# Altium PCB XS128.PcbDoc
Units mil, origin at the board's own origin, x right, y up, seen from the top; angles counter-clockwise.
Board outline 5839 x 5130 mil, 2 copper layers (Top Layer, Bottom Layer); 43 components, 110 nets, 387 pads, 0 vias.
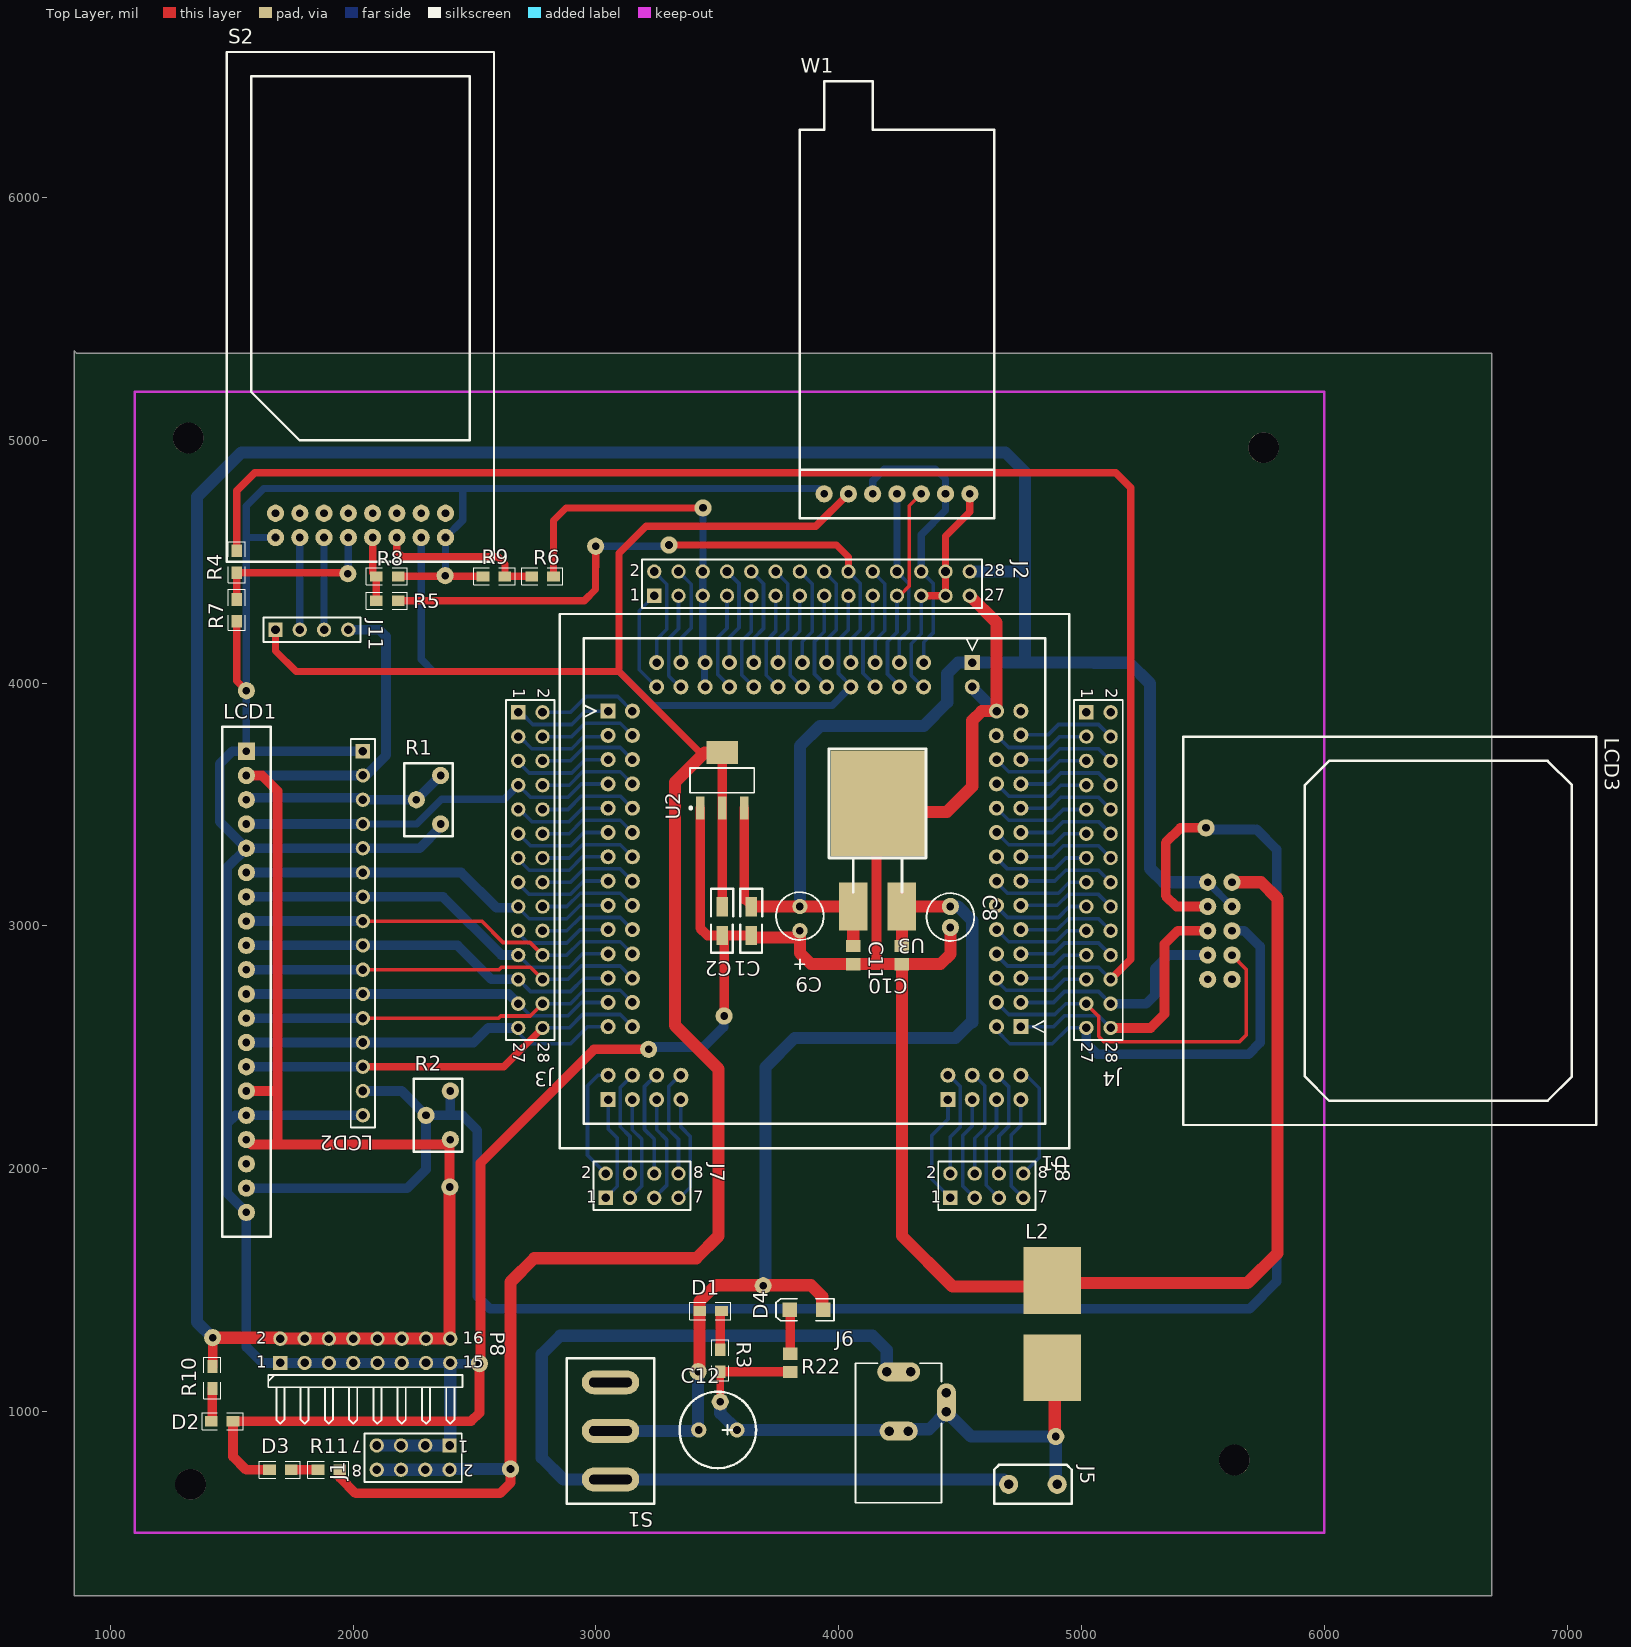
[diagram p0: Top Layer view]
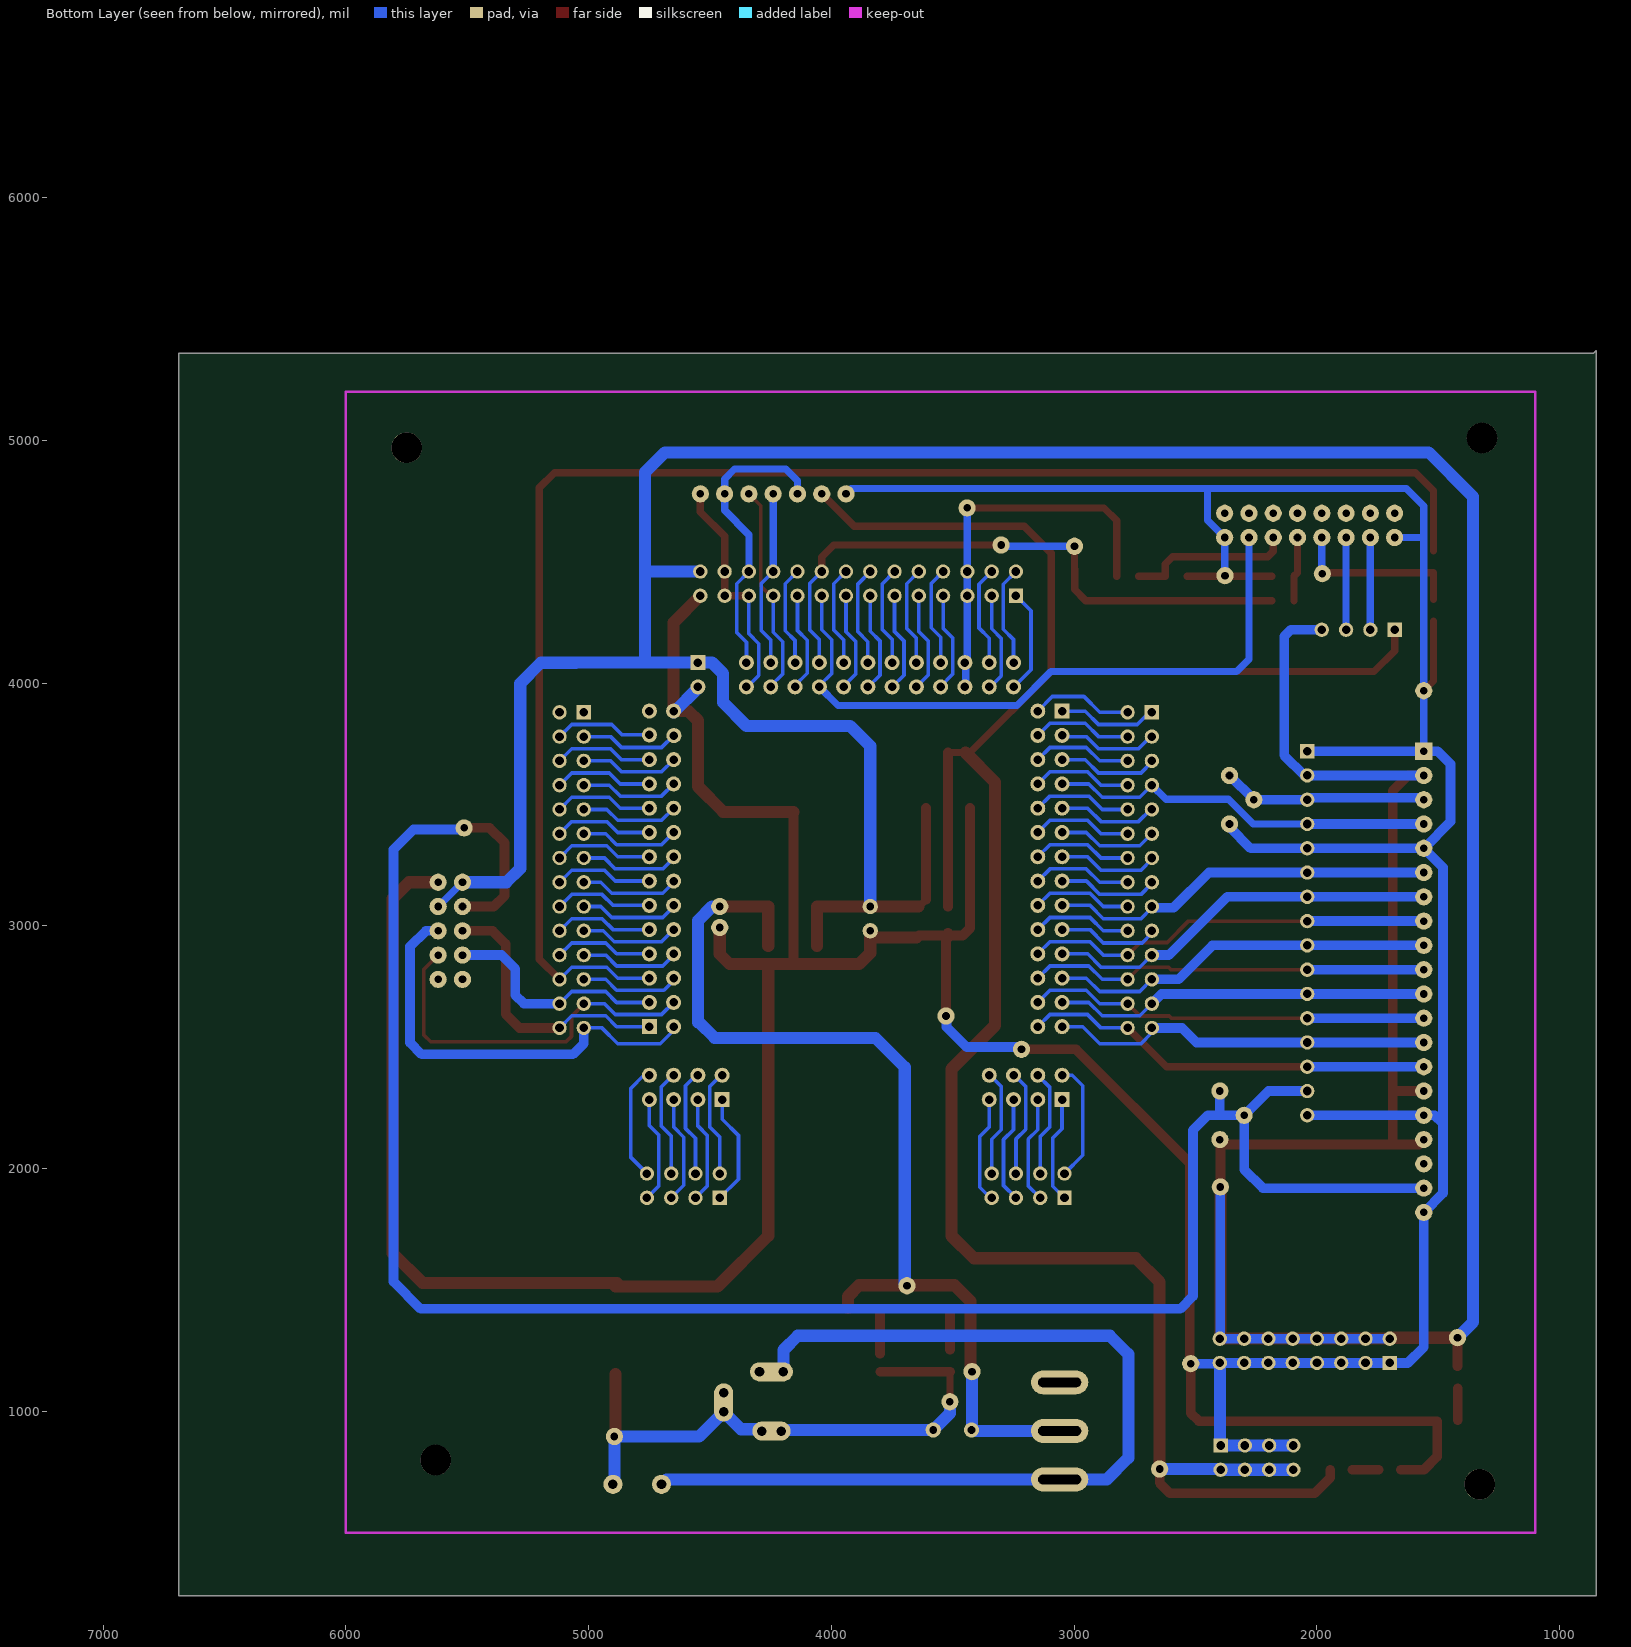
[diagram p1: Bottom Layer view, seen from below]

## Layer stack, top to bottom
Top Layer: signal copper 1.4
Dielectric: dielectric 12.6, FR-4, Dk 4.8
Bottom Layer: signal copper 1.4

## Board outline
850,5370 860,5360 6689,5360 6689,240 850,240 850,5360

## Design rules (kind name [scope] priority, off if disabled: settings)
Clearance [All] p1: gap=10
ComponentClearance [All] p1: gap=10 collisioncheckmode=3 verticalgap=10
PolygonConnect [All] p1: connectstyle=Relief reliefconductorwidth=10 reliefentries=4 polygonreliefangle="90 Angle"
RoutingVias [All] p1: holewidth=28 width=50 viastyle="Through Hole" minholewidth=28 minwidth=50 maxholewidth=28 maxwidth=50
SolderMaskExpansion [All] p1: expansion=4
TestPointUsage [All] p1: valid=0 allowmultiple=FALSE
Testpoint [All] p1: side=15 testpointundercomponent=TRUE minsize=40 maxsize=100 preferedsize=60 minholesize=0 maxholesize=40 preferedholesize=32 testpointgrid=1 style=1023 order=0-112345678
Width [All] p1: maxlimit=50 minlimit=10 preferedwidth=10
18 further rules are at their usual default settings.

## Components (designator, comment, footprint, x,y, rotation, side; value= is the part's Value field where it differs from the comment)
C1 "AVX_Cap" AVX_Cap_10uF 3640,3020 r270 top
C2 "AVX_Cap" AVX_Cap_10uF 3520,3020 r270 top
C8 "Cap Pol3" 0.47UF/50V 4460,3080 r270 top
C9 "Cap Pol3" 47uf/25V 3840,3080 r270 top
C10 "Cap" 6-0805 4260,2880 r270 top
C11 "Cap" 6-0805 4060,2880 r270 top
C12 "Cap Pol1" 470uF/25V 3502,924 r0 top
D1 "LED1" 0805电阻贴片#1 3472,1414 r0 top
D2 "LED1" 0805电阻贴片#1 1460,960 r180 top
D3 "LED1" 0805电阻贴片#1 1700,760 r0 top
D4 "LED1" 3.2X1.6X1.1 3867,1419 r180 top
J1 "Header 4X2" HDR2X4 2397,860 r180 top
J2 "Header 14X2" HDR2X14 3240,4360 r0 top
J3 "Header 14X2" HDR2X14 2680,3880 r270 top
J4 "Header 14X2" HDR2X14 5020,3880 r270 top
J5 "JieXianZhu_Power" jiexianzhu_power 4700,700 r0 top
J6 "PWR2.5" KLD-0202 4247,624 r90 top
J7 "Header 4X2" HDR2X4 3040,1880 r0 top
J8 "Header 4X2" HDR2X4 4460,1880 r0 top
J11 "Header1X4" HDR1X4 1680,4220 r0 top
L2 "Inductor" INDUCTOR 4880,1360 r90 top
LCD1 "12864" HDR!X20 1560,3720 r0 top
LCD2 "1602" HDR1X16 2040,3720 r270 top
LCD3 "5110" 5110 5620,3080 r270 top
P8 "Header 8X2H" HDR2X8H 1700,1200 r0 top
R1 "Adjustable_R" Adjustable_R 2260,3520 r90 top
R2 "Adjustable_R" Adjustable_R 2300,2220 r90 top
R3 "Res2" 0805电阻贴片#1 3512,1209 r270 top
R4 "Res2" 0805电阻贴片#2 1520,4500 r90 top
R5 "Res2" 0805电阻贴片#2 2140,4340 r0 top
R6 "Res2" 0805电阻贴片#2 2780,4440 r0 top
R7 "Res2" 0805电阻贴片#2 1520,4300 r270 top
R8 "Res2" 0805电阻贴片#2 2140,4440 r0 top
R9 "Res2" 0805电阻贴片#2 2580,4440 r180 top
R10 "Res2" 0805电阻贴片#2 1420,1140 r90 top
R11 "Res2" 0805电阻贴片#2 1900,760 r0 top
R22 "Res2" 2012[0805] 3800,1200 r90 top
S1 "Rockey_Switch" Rockey_Switch 3060,920 r270 top
S2 "SD" SD 1680,4600 r90 top
U1 "XS128" XS128接口 3900,3185 r270 top
U2 "LM1117" SOT230LM1117 3520,3600 r90 top
U3 "LM2940CT-5.0" LM2940 4260,3080 r180 top
W1 "Wireless" WIRELESS 3940,4780 r90 top

## Footprints (in the part's own frame and the unit in brackets; to place one, negate y for a bottom-side part, rotate by r counter-clockwise, add the part's x,y. Pads: shape width x height; smd on the part's side, far side on the other; paste and mask are expansions set on the pad)
0.47UF/50V [mm]
  round 1.8 hole 0.8: 1(0,0) 2(2.2,0)
  silkscreen extent -1.4,-2.5 3.6,2.5
3.2X1.6X1.1 [mm] "SMT LED; 2 Flat Leads"
  rect 1.5x1.5 smd: 1(-1.75,0) 2(1.75,0)
  silkscreen extent -2.9,-1.15 3.2,1.15
6-0805 [mm] "Chip Resistor; Body 2.0 x 1.3 mm (LxW typ)"
  rect 1.3x1.5 smd: 1(-0.95,0) 2(0.95,0)
47uf/25V [mm]
  round 1.6 hole 0.8: 1(0,0) 2(2.54,0)
  silkscreen extent -1.5,-2.5 6.55,2.5
470uF/25V [mm]
  round 1.6 hole 0.8: 1(-2,0) 2(2,0)
  silkscreen extent -4,-4 4,4
0805电阻贴片#1 [mil]
  rect 52.13x42.13 smd: 1(45,0) 2(-45,0)
  silkscreen extent -87,-35 83,35
0805电阻贴片#2 [mil]
  rect 52.13x42.13 smd: 1(-45,0) 2(45,0)
  silkscreen extent -87,-35 83,35
2012[0805] [mm] "Chip Resistor; Body 2.0 x 1.3 mm (LxW typ)"
  rect 1.3x1.5 smd: 1(-0.95,0) 2(0.95,0)
5110 [mm]
  round 1.8 hole 0.8: 0(-2.54,-2.54) 1(-2.54,0) 2(0,-2.54) 3(0,0) 4(2.54,-2.54) 5(2.54,0) 6(5.08,-2.54) 7(5.08,0) 8(7.62,-2.54) 9(7.62,0)
  silkscreen extent -17.78,-5.08 22.86,38.1
Adjustable_R [mm]
  round 1.8 hole 0.8: 1(-2.54,-2.54) 2(0,0) 2(2.54,-2.54)
  silkscreen extent -3.81,-3.81 3.81,1.27
AVX_Cap_10uF [mm]
  rect 2x1.2 smd: 1(-1.5,0) 2(1.5,0)
  silkscreen extent -3.4,-1.17 3.3,1.14
HDR1X4 [mm] "Connector; Header; 4 Position"
  rect 1.5x1.5 hole 0.9: 1(0,0)
  round 1.5 hole 0.9: 2(2.54,0) 3(5.08,0) 4(7.62,0)
  silkscreen extent -1.27,-1.27 8.89,1.27
HDR1X16 [mm] "Connector; Header; 16 Position"
  rect 1.5x1.5 hole 0.9: 1(0,0)
  round 1.5 hole 0.9: 2(2.54,0) 3(5.08,0) 4(7.62,0) 5(10.16,0) 6(12.7,0) 7(15.24,0) 8(17.78,0) 9(20.32,0) 10(22.86,0) 11(25.4,0) 12(27.94,0) 13(30.48,0) 14(33.02,0) 15(35.56,0) 16(38.1,0)
  silkscreen extent -1.27,-1.27 39.37,1.27
HDR2X4 [mm] "Connector; Header; 4x2 Position"
  rect 1.5x1.5 hole 0.9: 1(0,0)
  round 1.5 hole 0.9: 2(0,2.54) 3(2.54,0) 4(2.54,2.54) 5(5.08,0) 6(5.08,2.54) 7(7.62,0) 8(7.62,2.54)
  silkscreen extent -1.27,-1.27 8.89,3.81
HDR2X8H [mm] "Connector; Header; 8x2 Position; Right Angle"
  rect 1.5x1.5 hole 0.9: 1(0,0)
  round 1.5 hole 0.9: 2(0,2.54) 3(2.54,0) 4(2.54,2.54) 5(5.08,0) 6(5.08,2.54) 7(7.62,0) 8(7.62,2.54) 9(10.16,0) 10(10.16,2.54) 11(12.7,0) 12(12.7,2.54) 13(15.24,0) 14(15.24,2.54) 15(17.78,0) 16(17.78,2.54)
  silkscreen extent -1.27,-6.35 19.05,-1.27
HDR2X14 [mm] "Connector; Header; 14x2 Position"
  rect 1.5x1.5 hole 0.9: 1(0,0)
  round 1.5 hole 0.9: 2(0,2.54) 3(2.54,0) 4(2.54,2.54) 5(5.08,0) 6(5.08,2.54) 7(7.62,0) 8(7.62,2.54) 9(10.16,0) 10(10.16,2.54) 11(12.7,0) 12(12.7,2.54) 13(15.24,0) 14(15.24,2.54) 15(17.78,0) 16(17.78,2.54) 17(20.32,0) 18(20.32,2.54) 19(22.86,0) 20(22.86,2.54) 21(25.4,0) 22(25.4,2.54) 23(27.94,0) 24(27.94,2.54) 25(30.48,0) 26(30.48,2.54) 27(33.02,0) 28(33.02,2.54)
  silkscreen extent -1.27,-1.27 34.29,3.81
HDR!X20 [mm]
  rect 1.8x1.8 hole 0.8: 1(0,0)
  round 1.8 hole 0.8: 2(0,-2.54) 3(0,-5.08) 4(0,-7.62) 5(0,-10.16) 6(0,-12.7) 7(0,-15.24) 8(0,-17.78) 9(0,-20.32) 10(0,-22.86) 11(0,-25.4) 12(0,-27.94) 13(0,-30.48) 14(0,-33.02) 15(0,-35.56) 16(0,-38.1) 17(0,-40.64) 18(0,-43.18) 19(0,-45.72) 20(0,-48.26)
  silkscreen extent -2.54,-50.8 2.54,2.54
INDUCTOR [mm]
  rect 7x6 smd: 1(-4.572,0) 2(4.572,0)
jiexianzhu_power [mm]
  round 2 hole 1: 0(0,0) 1(5.08,0)
  silkscreen extent -1.52,-2.03 6.6,2.03
KLD-0202 [mm] "DC Power Jack, 2.5mm, KLD Series, PCB Mount"
  oval 2x4.5 all layers, no hole: 1(13.7,0)
  round 1.5 hole 1: 1A(13.7,-1.25) 1B(13.7,1.25) 2A(7.5,-1) 2B(7.5,1) 3A(9.5,-5) 3B(11.5,-5)
  oval 2x4 all layers, no hole: 2(7.5,0)
  oval 4x2 all layers, no hole: 3(10.5,-5)
  silkscreen extent 0,-4.5 14.6,4.5
LM2940 [mm]
  rect 3x5 smd: 1(0,0) 3(5.08,0)
  rect 9.924x11.07 smd: 2(2.44,-10.795)
  silkscreen extent -2.54,-16.51 7.62,-1.52
Rockey_Switch [mm]
  oval 2.5x6 hole 1 slot 4.5 at 90 deg: 0(-5.08,0) 1(0,0) 2(5.08,0)
  silkscreen extent -7.62,-4.57 7.62,4.57
SD [mm]
  round 1.8 hole 0.8: 0(0,0) 1(0,-2.54) 2(0,-5.08) 3(0,-7.62) 4(0,-10.16) 5(0,-12.7) 6(0,-15.24) 7(0,-17.78) 8(2.54,-17.78) 9(2.54,-15.24) 10(2.54,-12.7) 11(2.54,-10.16) 12(2.54,-7.62) 13(2.54,-5.08) 14(2.54,-2.54) 15(2.54,0)
  silkscreen extent -2.54,-22.86 50.8,5.08
SOT230LM1117 [mm]
  rect 2.4x0.9 smd: 1(-2.9,2.3) 2(-2.9,0) 3(-2.9,-2.3)
  rect 2.4x3.3 smd: 4(2.9,0)
  silkscreen extent -3.02,-3.35 1.3,3.42, body extent -1.85,-3.35 1.85,3.35, height 1.8
WIRELESS [mm]
  round 1.8 hole 0.8: 0(0,0) 1(0,-2.54) 2(0,-5.08) 3(0,-7.62) 4(0,-10.16) 5(0,-12.7) 6(0,-15.24)
  silkscreen extent -2.54,-17.78 43.18,2.54
XS128接口 [mil]
  rect 62x62 hole 35: 101(-700,-850) 201(-900,650) 301(600,850) 401(900,-850) 501(900,550)
  round 62 hole 35: 102(-700,-750) 103(-600,-850) 104(-600,-750) 105(-500,-850) 106(-500,-750) 107(-400,-850) 108(-400,-750) 109(-300,-850) 110(-300,-750) 111(-200,-850) 112(-200,-750) 113(-100,-850) 114(-100,-750) 115(0,-850) 116(0,-750) 117(100,-850) 118(100,-750) 119(200,-850) 120(200,-750) 121(300,-850) 122(300,-750) 123(400,-850) 124(400,-750) 125(500,-850) 126(500,-750) 127(600,-850) 128(600,-750) 202(-800,650) 205(-900,450) 206(-800,450) 207(-900,350) 208(-800,350) 209(-900,250) 210(-800,250) 211(-900,150) 212(-800,150) 213(-900,50) 214(-800,50) 215(-900,-50) 216(-800,-50) 217(-900,-150) 218(-800,-150) 219(-900,-250) 220(-800,-250) 221(-900,-350) 222(-800,-350) 223(-900,-450) 224(-800,-450) 225(-900,-550) 226(-800,-550) 227(-900,-650) 228(-800,-650) 302(600,750) 303(500,850) 304(500,750) 305(400,850) 306(400,750) 307(300,850) 308(300,750) 309(200,850) 310(200,750) 311(100,850) 312(100,750) 313(0,850) 314(0,750) 315(-100,850) 316(-100,750) 317(-200,850) 318(-200,750) 319(-300,850) 320(-300,750) 321(-400,850) 322(-400,750) 323(-500,850) 324(-500,750) 325(-602,850) 326(-599,749) 327(-700,850) 328(-700,750) 402(800,-850) 403(900,-750) 404(800,-750) 405(900,-650) 406(800,-650) 407(900,-550) 408(800,-550) 502(800,550) 503(900,650) 504(800,650) 505(900,750) 506(800,750) 507(900,850) 508(800,850)
  silkscreen extent -1100,-1050 1100,1050

## Part data
C8 C9: library part Cap, "Polarized Capacitor (Surface Mount)"
C10 C11: "Capacitor"
C12: "Polarized Capacitor (Radial)"
D1 D2 D3: "RED_LED"
D4: "Typical RED GaAs LED"
J1 J7 J8: "Header, 4-Pin, Dual row"
J2 J3 J4: "Header, 14-Pin, Dual row"
J6: "Low Voltage Power Supply Connector"
L2: library part Indu
P8: "Header, 8-Pin, Dual row, Right Angle"
R3 R4 R5 R6 R7 R8 R9 R10 R11 R22: "Resistor"
U3: library part LM2940CT

## Free pads (board coordinates)
  round 70.87 hole 31.5: 0(1978,4451) 0(3689,1518) 1(1421,1304) 1(2379,4443) 2(2999,4564) 2(3528,2629) 3(3217,2492) 3(3301,4569) 4(1560,3969) 4(2520,1197) 5(2648,763) 5(3441,4722) 6(5513,3404) 7(3421,1164) 8(3512,1040) 10(4894,897) 13(2398,1925)
  round 125.98 hole 125.98: 6(5750,4970) 7(5630,800) 8(1330,700) 9(1320,5010)

## Nets (pads, with @x,y where several pads share a name; then routed paths per layer and width w, separated by ;. In a path a pad name is that pad's centre, name@x,y a point inside that pad or via, vN(x,y) a via of type N, cw(c..) or ccw(c..) an arc to the next point about the centre after c; other vN are vias at no path point)
+3.3: J11.2 S2.1 | length 380
  Bottom Layer w30: J11.2 S2.1
+3.3V: C2.1 J1.2 J1.4 J1.6 J1.8 J11.1 pad.5@2648,763 R11.2 U2.2 U2.4 W1.1 | length 9484.1
  Top Layer w30: J11.1 1680,4133 1765,4048 3095,4048 ; U2.4 3428.83,3714.17 3095,4048 ; W1.1 3906,4646 3206,4646 3095,4535 3095,4048
  Top Layer w40: R11.2 1945,728 2010,663 2605,663 2648,706 pad.5@2648,763 ; C2.1 U2.4
  Top Layer w50: pad.5@2648,763 2648,1533 2746,1631 3413,1631 3505,1723 3505,2411 3326,2590 3326,3592 3448.17,3714.17
  Bottom Layer w20: J1.8@2090,756 J1.8@2094,760
  Bottom Layer w50: J1.8@2094,760 J1.2 ; J1.2@2400,763 pad.5@2648,763
+5: J11.3 S2.2 | length 380
  Bottom Layer w30: J11.3 S2.2
+5V: C1.1 C9.1 C11.1 J2.28 J11.4 LCD1.2 LCD1.15 LCD1.17 LCD2.2 LCD3.0 LCD3.3 P8.2 P8.4 P8.6 P8.8 P8.10 P8.12 P8.14 P8.16 pad.1@1421,1304 pad.13 R2.1 R10.2 U1.201 U2.3 U3.3 | length 19638
  Top Layer w30: LCD1.17 LCD1.17@1580,2100 ; R2.1@2380,2100 R2.1 ; 3610.55,3108.5 C1.1
  Top Layer w40: R10.2@1421,1186 pad.1@1421,1304 ; LCD1.15 1684,2320 ; LCD1.2 1624,3620 1688,3556 1688,2100 ; LCD1.17@1580,2100 R2.1@2380,2100 ; pad.13@2397.13,1925.87 R2.1@2397.13,2117.13 ; 3610.55,3108.5 U2.3
  Top Layer w50: pad.1@1421,1304 1696,1304 P8.2 P8.4 P8.6 P8.16 2397.13,1302.87 pad.13@2397.13,1925.87 ; C1.1@3640.94,3080 U3.3 C11.1
  Bottom Layer w3: LCD2.2@2042,3620 LCD2.2@2052,3620
  Bottom Layer w30: LCD3.0 LCD3.3
  Bottom Layer w40: LCD1.2 LCD2.2@2042,3620 ; P8.2 P8.16 ; J11.4 2108,4220 2135,4193 2135,3703 LCD2.2@2052,3620 ; P8.16@2398,1302 pad.13
  Bottom Layer w50: pad.1@1421,1304 1357,1368 1357,4768 1540,4951 4686,4951 4768,4869 4768,4085 ; C9.1 3840,3741 3923,3824 4350,3824 4447,3921 4447,4040 4492,4085 5051,4085 5052,4084 5197,4084 5282,3999 5282,3237 5339,3180 LCD3.0 ; J2.28 4764,4460 4768,4456
A0: J4.28 LCD3.4 U1.301 | length 1144.3
  Top Layer w40: J4.28 5285,2580 5342,2637 5342,2926 5396,2980 LCD3.4
  Bottom Layer w15: U1.301 4885,2585 4930,2630 5070,2630 J4.28
A1: J4.27 LCD3.5 U1.302 | length 1792.2
  Bottom Layer w15: U1.302 4650,2570 4705,2515 4880,2515 4945,2580 J4.27
  Bottom Layer w40: J4.27 5020,2516 5065,2471 5688,2471 5736,2519 5736,2915 5671,2980 LCD3.5
A2: J4.26 LCD3.6 U1.303 | length 955.5
  Bottom Layer w15: U1.303 4885,2685 4930,2730 5070,2730 J4.26
  Bottom Layer w40: J4.26 5267,2680 5303,2716 5303,2824 5359,2880 LCD3.6
A3: J4.25 LCD3.7 U1.304 | length 1548.2
  Top Layer w15: J4.25 5021,2680 5021,2677 5071,2627 5071,2545 5093,2523 5651,2523 5679,2551 5679,2821 LCD3.7
  Bottom Layer w15: U1.304 4700,2635 4890,2635 4935,2680 J4.25
A4: J4.24 R4.2 U1.305 | length 6456.1
  Top Layer w30: R4.2 1520,4793 1594,4867 5141,4867 5203,4805 5203,2863 J4.24
  Bottom Layer w15: U1.305 4880,2785 4925,2830 5070,2830 J4.24
A5: J4.23 U1.306 | length 415.2
  Bottom Layer w15: U1.306 4650,2775 4690,2735 4885,2735 4930,2780 J4.23
A6: J4.22 U1.307 | length 409.4
  Bottom Layer w15: U1.307 4885,2885 4930,2930 5070,2930 J4.22
A7: J4.21 U1.308 | length 412.3
  Bottom Layer w15: U1.308 4650,2880 4695,2835 4885,2835 4930,2880 J4.21
AD0: J4.20 U1.309 | length 409.4
  Bottom Layer w15: U1.309 4900,2985 4945,3030 5070,3030 J4.20
AD1: J4.18 U1.311 | length 409.4
  Bottom Layer w15: U1.311 4900,3085 4945,3130 5070,3130 J4.18
AD2: J4.16 U1.313 | length 409.4
  Bottom Layer w15: U1.313 4890,3185 4935,3230 5070,3230 J4.16
AD3: J4.14 U1.315 | length 409.4
  Bottom Layer w15: U1.315 4880,3285 4925,3330 5070,3330 J4.14
AD4: J4.12 U1.317 | length 409.4
  Bottom Layer w15: U1.317 4880,3385 4925,3430 5070,3430 J4.12
AD5: J4.10 U1.319 | length 409.4
  Bottom Layer w15: U1.319 4870,3485 4915,3530 5070,3530 J4.10
AD6: J4.8 U1.321 | length 409.4
  Bottom Layer w15: U1.321 4870,3585 4915,3630 5070,3630 J4.8
AD7: J4.6 U1.323 | length 409.4
  Bottom Layer w15: U1.323 4865,3685 4910,3730 5070,3730 J4.6
AD8: J4.19 U1.310 | length 409.4
  Bottom Layer w15: U1.310 4700,2935 4895,2935 4940,2980 J4.19
AD9: J4.17 U1.312 | length 412.3
  Bottom Layer w15: U1.312 4650,3080 4695,3035 4905,3035 4950,3080 J4.17
AD10: J4.15 U1.314 | length 412.3
  Bottom Layer w15: U1.314 4650,3180 4695,3135 4905,3135 4950,3180 J4.15
AD11: J4.13 U1.316 | length 412.3
  Bottom Layer w15: U1.316 4650,3280 4695,3235 4890,3235 4935,3280 J4.13
AD12: J4.11 U1.318 | length 409.4
  Bottom Layer w15: U1.318 4700,3335 4885,3335 4930,3380 J4.11
AD13: J4.9 U1.320 | length 409.4
  Bottom Layer w15: U1.320 4700,3435 4880,3435 4925,3480 J4.9
AD14: J4.7 U1.322 | length 409.4
  Bottom Layer w15: U1.322 4700,3535 4870,3535 4915,3580 J4.7
AD15: J4.5 U1.324 | length 409.4
  Bottom Layer w15: U1.324 4700,3635 4865,3635 4910,3680 J4.5
B0: J3.21 LCD1.7 LCD2.7 U1.121 | length 1632.9
  Bottom Layer w15: J3.21 2730,2830 2889.64,2830 2944.64,2885 U1.121
  Bottom Layer w40: LCD1.7 2370,3120 2610,2880 J3.21
B1: J3.22 LCD1.8 LCD2.8 U1.122 | length 1690.8
  Top Layer w15: LCD2.8 2529,3020 2617,2932 2728,2932 J3.22
  Bottom Layer w15: LCD2.8@2028,3020 LCD2.8@2036,3028 ; J3.22 2880,2880 2935,2935 3100,2935 U1.122
  Bottom Layer w40: LCD1.8 LCD2.8@2028,3020
B2: J3.23 LCD1.9 LCD2.9 U1.123 | length 1596.5
  Bottom Layer w12: J3.23@2680,2775 J3.23
  Bottom Layer w15: J3.23 2730,2730 2895,2730 2950,2785 U1.123
  Bottom Layer w40: LCD1.9 2430,2920 2570,2780 J3.23
B3: J3.24 LCD1.10 LCD2.10 U1.124 | length 1658.3
  Top Layer w15: LCD2.10 2601,2820 2611,2830 2730,2830 J3.24
  Bottom Layer w15: J3.24 2885,2780 2940,2835 3100,2835 U1.124
  Bottom Layer w40: LCD1.10 LCD2.10
B4: J3.25 LCD1.11 LCD2.11 U1.125 | length 1553
  Bottom Layer w12: J3.25 J3.25@2685,2680
  Bottom Layer w15: J3.25@2685,2680 2685,2675 2730,2630 2885,2630 2940,2685 U1.125
  Bottom Layer w40: LCD1.11 2640,2720 J3.25
B5: J3.26 LCD1.12 LCD2.12 U1.126 | length 1658.3
  Top Layer w15: LCD2.12 2599,2620 2608,2629 2729,2629 J3.26
  Bottom Layer w15: J3.26 2895,2680 2950,2735 3100,2735 U1.126
  Bottom Layer w40: LCD1.12 LCD2.12
B6: J3.27 LCD1.13 LCD2.13 U1.127 | length 1582.5
  Bottom Layer w15: J3.27 2680,2560 2725,2515 2895,2515 2965,2585 U1.127
  Bottom Layer w40: LCD1.13 2496,2520 2556,2580 J3.27
B7: J3.28 LCD1.14 LCD2.14 U1.128 | length 1699.8
  Top Layer w30: LCD2.14 2620,2420 J3.28
  Bottom Layer w15: J3.28 2890,2580 2945,2635 3100,2635 U1.128
  Bottom Layer w40: LCD1.14 LCD2.14
BLA+: LCD1.19 LCD2.15 LCD3.2 pad.6@5513,3404 R2.2 | length 8375.1
  Top Layer w40: pad.6@5513,3404 5408,3404 5347,3343 5347,3124 5391,3080 LCD3.2
  Bottom Layer w30: 2400,2223 2403,2220 ; pad.6@5513,3404 pad.6@5520,3397
  Bottom Layer w40: LCD1.19 2223,1920 2300,1997 R2.2@2300,2220 ; LCD2.15 2200,2320 R2.2@2300,2220 ; 2400,2223 R2.2@2400,2320 ; pad.6@5520,3397 5709,3397 ; 5722,3397 5804,3315 5804,1535 5692,1423 2563,1423 2511,1475 2511,2159 2450,2220 R2.2@2300,2220
CS: pad.0@1978,4451 R4.1 R7.1 S2.3 | length 719.5
  Top Layer w30: R7.1 R4.1 1974,4455 pad.0@1978,4451
  Bottom Layer w30: pad.0@1978,4451 1980,4453 S2.3
E0: J8.8 U1.508 | length 477.3
  Bottom Layer w15: U1.508 4773,2385 4826,2332 4826,2046 J8.8
E1: J8.7 U1.507 | length 441.5
  Bottom Layer w15: U1.507 4750,2178 4711,2139 4711,1929 J8.7
E2: J8.6 U1.506 | length 450.9
  Bottom Layer w15: U1.506@4650,2391 U1.506 4653,2385 4701,2337 4701,2176 4660,2135 J8.6
E3: J8.5 U1.505 | length 447.9
  Bottom Layer w15: U1.505 4650,2172 4608,2130 4608,1932 J8.5
  Bottom Layer w20: J8.5@4660,1876 J8.5
E4: J7.7 U1.407 | length 455.7
  Bottom Layer w12: J7.7 J7.7@3340,1885
  Bottom Layer w15: J7.7@3337,1872 3389,1924 3389,2133 3350,2172 U1.407
E5: J7.5 U1.405 | length 443.1
  Bottom Layer w15: J7.5 3291,1931 3291,2120 3250,2161 U1.405
E6: J7.8 U1.408 | length 444.6
  Bottom Layer w15: J7.8 3340,2121 3300,2161 3300,2339 3346,2385 U1.408
E7: J7.6 U1.406 | length 464.6
  Bottom Layer w12: J7.6 J7.6@3240,1990 ; U1.406@3246,2385 U1.406 U1.406@3250,2375
  Bottom Layer w15: J7.6 3240,2122 3200,2162 3200,2339 U1.406@3246,2385
GND: C1.2 C2.2 C8.2 C9.2 C10.2 C11.2 D2.2 D3.2 J1.1 J1.3 J1.5 J1.7 J2.27 L2.2 LCD1.1 LCD1.5 LCD1.16 LCD1.20 LCD2.1 LCD2.5 LCD2.16 LCD3.1 P8.1 P8.3 P8.5 P8.7 P8.9 P8.11 P8.13 P8.15 pad.1@2379,4443 pad.2@3528,2629 pad.3@3217,2492 pad.4 R1.1 R7.2 R8.2 R9.2 S2.0 S2.7 U1.202 U1.328 U2.1 U3.2 W1.0 | length 23174.1
  Top Layer w30: R7.2 1520,4009 pad.4@1560,3969 ; R8.2 R9.2 ; C1.2 C1.2@3648.94,2952 ; 3812,2952 C9.2 ; 4156,2853 4166.4,2842.6
  Top Layer w40: D3.2 1559,760 1505,814 D2.2 2486,960 2520,994 2520,1197 2524,1201 2524,2024 2992,2492 pad.3@3217,2492 ; U2.1 3429.45,2990.55 3459.06,2960.94 C1.2 ; C2.2@3520,2972 3520,2950 3528,2942 pad.2@3528,2629 ; 4156,2853 U3.2@4156,3470
  Top Layer w50: C1.2@3648.94,2952 3812,2952 ; C9.2 3840,2889 3886.4,2842.6 4418.6,2842.6 4460,2884 C8.2 ; U3.2@4156,3470 4446,3470 4550,3574 4550,3846 4589,3885 U1.328 4650,4250 J2.27 ; C10.2 4260,1724 4469,1515 L2.2@4890,1515 ; L2.2@4883,1529 5684,1529 5807,1652 5807,3113 5740,3180 LCD3.1
  Bottom Layer w15: U1.328@4650,3880 U1.328
  Bottom Layer w20: R1.1@2360,3407 R1.1 ; P8.15@2386,1200 P8.15@2401,1215
  Bottom Layer w30: LCD1.1@1557,3720 1560,3723 1560,3969 1560,4730 1632,4802 3918,4802 W1.0 ; 1561,4600 S2.0 ; pad.1@2380,4444 S2.7 2451,4671 2451,4801
  Bottom Layer w40: 1481,2186 1515,2220 LCD2.16 ; LCD2.1 1503,3720 1450,3667 1450,3430 LCD1.5 ; R1.1@2360,3407 2273,3320 LCD1.5 ; P8.15@2386,1200 1626,1200 1560,1266 LCD1.20 1481,1899 1481,3241 LCD1.5 ; P8.15@2403,1197 pad.4@2520,1197 ; pad.3@3217,2492 3226,2501 3443,2501 3526,2584 3526,2629 pad.2@3528,2629
  Bottom Layer w50: J1.7 J1.1 ; J1.1@2400,863 P8.15 ; U1.202 4550,3980 U1.328@4650,3880
H0: J8.4 U1.504 | length 447.8
  Bottom Layer w15: U1.504 4558,2385 4601,2342 4601,2166 4560,2125 J8.4
H1: J8.3 U1.503 | length 441.5
  Bottom Layer w15: U1.503 4550,2176 4511,2137 4511,1929 J8.3
H2: J8.2 U1.502 | length 446
  Bottom Layer w15: U1.502 4455,2385 4501,2339 4501,2172 4460,2131 J8.2
H3: J8.1 U1.501 | length 464.6
  Bottom Layer w15: U1.501 4450,2204 4383,2137 4383,1957 J8.1
H4: J7.3 U1.403 | length 441.5
  Bottom Layer w15: J7.3 3189,1929 3189,2122 3150,2161 U1.403
H5: J7.4 U1.404 | length 448.3
  Bottom Layer w15: J7.4 3140,2133 3100,2173 3100,2335 U1.404 U1.404@3144,2385
H6: J7.1 U1.401 | length 440.6
  Bottom Layer w15: J7.1 3088,1928 3088,2127 3050,2165 U1.401
H7: J7.2 U1.402 | length 495.9
  Bottom Layer w15: J7.2 2965,2055 2965,2342 3008,2385 U1.402
J0: J3.20 U1.120 | length 413.5
  Bottom Layer w15: J3.20 2880,2980 2935,3035 3100,3035 U1.120
J1: J3.19 U1.119 | length 419.4
  Bottom Layer w15: J3.19 2680,2970 2720,2930 2880,2930 2935,2985 U1.119
J6: J2.14 U1.215 | length 413.1
  Bottom Layer w15: J2.14 3891,4409 3891,4212 3850,4171 U1.215
J7: J2.13 U1.216 | length 413.5
  Bottom Layer w15: J2.13 3840,4214 3800,4174 3800,4033 3848,3985 U1.216
K0: J3.8 U1.108 | length 413.5
  Bottom Layer w15: J3.8 2890,3580 2945,3635 3100,3635 U1.108
K1: J3.7 LCD1.4 LCD2.4 U1.107 | length 1585.8
  Bottom Layer w15: J3.7 2730,3530 2885,3530 2940,3585 U1.107
  Bottom Layer w30: LCD2.4 2262,3420 2364,3522 2622,3522 J3.7
  Bottom Layer w40: LCD1.4 LCD2.4@2026,3420
K2: J3.6 U1.106 | length 413.5
  Bottom Layer w15: J3.6 2895,3680 2950,3735 3100,3735 U1.106
K3: J3.5 U1.105 | length 416.4
  Bottom Layer w15: J3.5 2680,3675 2725,3630 2900,3630 2955,3685 U1.105
K4: J3.17 LCD1.6 LCD2.6 U1.117 | length 1586.5
  Bottom Layer w15: J3.17 2680,3075 2725,3030 2880,3030 2935,3085 U1.117
  Bottom Layer w40: LCD1.6 LCD2.6@2030,3220 ; LCD2.6 2445,3220 2590,3075 J3.17@2680,3075
K5: J3.18 U1.118 | length 413.5
  Bottom Layer w15: J3.18 2880,3080 2935,3135 3100,3135 U1.118
K7: J2.5 J2.6 pad.5@3441,4722 R6.2 U1.223 U1.224 | length 1610.9
  Top Layer w30: R6.2 2825,4670 2877,4722 pad.5@3441,4722
  Bottom Layer w15: U1.224@3447,3985 U1.224
  Bottom Layer w30: pad.5@3441,4722 3441,4461 J2.6 3440,4095 3447,4088 U1.224@3447,3985
M0: J2.8 U1.221 | length 411.5
  Bottom Layer w15: J2.8 3589,4411 3589,4228 3550,4189 U1.221
M1: J2.7 U1.222 | length 411.5
  Bottom Layer w15: J2.7 3540,4226 3501,4187 3501,4037 3550,3988 U1.222
M2: J2.10 U1.219 | length 412.3
  Bottom Layer w15: J2.10 3690,4410 3690,4225 3650,4185 U1.219
M3: J2.9 U1.220 | length 411.5
  Bottom Layer w15: J2.9 3640,4213 3601,4174 3601,4034 U1.220
M4: J2.12 U1.217 | length 412.3
  Bottom Layer w15: J2.12 3790,4410 3790,4220 3750,4180 U1.217
M5: J2.11 U1.218 | length 412
  Bottom Layer w15: J2.11 3740,4213 3701,4174 3701,4033 3749,3985 U1.218
M6: J2.24 U1.205 W1.2 W1.5 | length 1225.6
  Bottom Layer w15: J2.24 4390,4410 4390,4209 4350,4169 U1.205
  Bottom Layer w30: W1.2 4140,4834 4188,4882 4399,4882 4440,4841 4440,4712 4340,4612 J2.24
M7: J2.23 J2.25 J2.26 U1.206 W1.6 | length 976.9
  Top Layer w30: J2.23 J2.25 4440,4605 4540,4705 W1.6
  Bottom Layer w15: J2.23 4340,4204 4299,4163 4299,4032 4346,3985 U1.206
MOSI: R5.1 R8.1 S2.4 | length 266.2
  Top Layer w30: S2.4 2080,4455 R8.1 R5.1
N: J4.4 U1.325 | length 408.5
  Bottom Layer w15: U1.325 4862,3787 4905,3830 5070,3830 J4.4
NetD1_1: D1.1 R3.2 | length 162.1
  Top Layer w20: D1.1@3512,1409 D1.1
  Top Layer w40: R3.2 D1.1@3512,1409
NetD2_1: D2.1 R10.1 | length 130
  Top Layer w40: D2.1@1420,965 R10.1
NetD3_1: D3.1 R11.1 | length 110
  Top Layer w40: D3.1 R11.1
NetD4_2: D4.2 R22.2 | length 183.6
  Top Layer w40: R22.2 D4.2@3800,1421
NetJ5_0: J5.0 J6.1 J6.1A J6.1B S1.2 | length 3961.6
  Bottom Layer w30: J5.0@4680,720 J5.0
  Bottom Layer w50: J6.1B 4197.79,1253.21 4139,1312 2853,1312 2777,1236 2777,809 2866,720 J5.0@4680,720
P0: J3.4 U1.104 | length 413.5
  Bottom Layer w15: J3.4 2900,3780 2955,3835 3100,3835 U1.104
P1: J3.3 U1.103 | length 413.5
  Bottom Layer w15: J3.3 2685,3780 2735,3730 2900,3730 2950,3780 3045,3780 U1.103
P2: J3.2 U1.102 | length 421.8
  Bottom Layer w15: J3.2 2895,3880 2960,3945 3090,3945 U1.102
P3: J3.1 U1.101 | length 396.4
  Bottom Layer w15: J3.1@2695,3875 2740,3830 2900,3830 2955,3885 U1.101
P4: J2.1 U1.228 | length 431.7
  Bottom Layer w15: J2.1 3178,4298 3178,4055 3248,3985 U1.228
P5: J2.2 U1.227 | length 413.9
  Bottom Layer w15: J2.2 3292,4408 3292,4222 3250,4180 U1.227
P6: J2.3 U1.226 | length 415.2
  Bottom Layer w15: J2.3 3340,4224 3300,4184 3300,4030 3345,3985 U1.226
P7: J2.4 U1.225 | length 413.9
  Bottom Layer w15: J2.4 3392,4408 3392,4227 3350,4185 U1.225
PGND: C12.2 J5.1 J6.2 J6.2A J6.2B J6.3 J6.3A J6.3B L2.1 pad.8@3512,1040 pad.10 R3.1 R22.1 | length 2397.7
  Top Layer w30: pad.8@3512,1040 R3.1 ; R22.1@3798.6,1164 R22.1 ; pad.10@4890,901 pad.10
  Top Layer w40: R3.1 R22.1@3798.6,1164
  Top Layer w50: pad.10@4890,901 L2.1@4890,1155
  Bottom Layer w30: J6.2B@4202.91,924 J6.2B J6.2A ; J6.2A@4284,929 J6.2A@4286.37,926.63
  Bottom Layer w50: pad.8@3512,1040 3512,992.74 C12.2 J6.2B@4202.91,924 ; J6.2A@4286.37,926.63 4372.46,926.63 J6.3A 4544.87,897 pad.10 J5.1@4894,706
S0: J2.21 U1.208 W1.4 | length 879.3
  Top Layer w15: J2.21 4251,4360 4291,4400 4291,4731 W1.4
  Bottom Layer w15: J2.21 4240,4210 4201,4171 4201,4038 4250,3989 U1.208
S1: J2.22 U1.207 W1.3 | length 731.5
  Bottom Layer w15: J2.22 4289,4411 4289,4217 4250,4178 U1.207
  Bottom Layer w30: J2.22 W1.3
S2: J2.19 U1.210 | length 412.3
  Bottom Layer w15: J2.19 4140,4217 4100,4177 4100,4041 4150,3991 U1.210
S3: J2.20 U1.209 | length 412.3
  Bottom Layer w15: J2.20 4190,4410 4190,4216 4150,4176 U1.209
S4: J2.17 S2.6 U1.212 | length 2795.1
  Bottom Layer w15: J2.17 4040,4220 3999,4179 3999,4040 4050,3989 U1.212
  Bottom Layer w30: S2.6 2280,4099 2331,4048 3096,4048 3236,3908 3973,3908 U1.212
S5: J2.18 pad.2@2999,4564 pad.3@3301,4569 R5.2 U1.211 | length 2537.8
  Top Layer w30: R5.2 2952,4340 2998,4386 pad.2@2999,4564 ; pad.3@3301,4569 3991,4569 4040,4520 J2.18
  Bottom Layer w15: J2.18 4089,4411 4089,4219 4050,4180 U1.211
  Bottom Layer w30: pad.2@2999,4564 pad.3@3296,4564
S6: J2.15 U1.214 | length 412.3
  Bottom Layer w15: J2.15 3940,4212 3900,4172 3900,4038 3950,3988 U1.214
S7: J2.16 U1.213 | length 412.3
  Bottom Layer w15: J2.16 3990,4410 3990,4219 3950,4179 U1.213
SCLK: R6.1 R9.1 S2.5 | length 684
  Top Layer w30: S2.5 2180,4544 2203,4521 2595,4521 2625,4491 R9.1 R6.1
T0: J3.9 U1.109 | length 413.5
  Bottom Layer w15: J3.9 2685,3480 2735,3430 2890,3430 2945,3485 U1.109
T1: J3.10 U1.110 | length 413.5
  Bottom Layer w15: J3.10 2885,3480 2940,3535 3100,3535 U1.110
T2: J3.11 U1.111 | length 413.5
  Bottom Layer w15: J3.11 2730,3330 2895,3330 2950,3385 U1.111
T3: J3.12 U1.112 | length 413.5
  Bottom Layer w15: J3.12 2890,3380 2945,3435 3100,3435 U1.112
T4: J3.13 U1.113 | length 416.4
  Bottom Layer w15: J3.13 2680,3275 2725,3230 2890,3230 2945,3285 U1.113
T5: J3.14 U1.114 | length 413.5
  Bottom Layer w15: J3.14 2890,3280 2945,3335 3100,3335 U1.114
T6: J3.15 U1.115 | length 416.4
  Bottom Layer w15: J3.15 2680,3175 2725,3130 2894.64,3130 2949.64,3185 U1.115
T7: J3.16 U1.116 | length 418.5
  Bottom Layer w15: J3.16@2775,3185 J3.16@2775,3190 ; J3.16 2895,3180 2950,3235 3100,3235 U1.116
V_BAT: C8.1 C10.1 C12.1 D1.2 D4.1 pad.0@3689,1518 pad.7@3421,1164 S1.1 U3.1 | length 4225
  Top Layer w30: pad.7@3421,1164 pad.7@3427,1170
  Top Layer w50: pad.7@3427,1170 3427,1454 3493,1520 3886,1520 3932,1474 D4.1@3932,1426 ; C10.1 U3.1 C8.1
  Bottom Layer w30: C12.1@3414.74,920 3421,926.26 C12.1
  Bottom Layer w40: pad.0@3689,1518 pad.0@3698,1527 ; C8.1 C8.1@4492,3080 ; 4544,2602 4550,2602
  Bottom Layer w50: S1.1 C12.1@3414.74,920 ; C12.1@3421,926.26 pad.7@3421,1164 ; pad.0@3698,1527 3698,2418 3819,2539 4481,2539 4544,2602 ; C8.1@4492,3080 4550,3022 4550,2602
VL: LCD1.3 LCD2.3 R1.2 | length 838.4
  Bottom Layer w40: LCD1.3@1566,3528 LCD2.3@2043,3528 ; LCD2.3 2260,3520 R1.2@2360,3620
VRH: J4.3 U1.326 | length 409.9
  Bottom Layer w15: U1.326 4651,3784 4700,3735 4865,3735 4910,3780 J4.3
pads on no net: J4.1 J4.2 LCD1.18 LCD3.8 LCD3.9 S1.0 S2.8 S2.9 S2.10 S2.11 S2.12 S2.13 S2.14 S2.15 U1.327

## Keep-outs
Keep-Out Layer:
  lines w10: 1100,500 6000,500 6000,5200 1100,5200 1100,500

## Text inside footprints (layer, text, board x,y; h text height)
J1: Top Overlay "8" at 2037,780 h50 r180; Top Overlay "7" at 2037,880 h50 r180; Top Overlay "1" at 2477,880 h50 r180; Top Overlay "2" at 2497,780 h50 r180
J2: Top Overlay "28" at 4600,4440 h50; Top Overlay "27" at 4600,4340 h50; Top Overlay "1" at 3140,4340 h50; Top Overlay "2" at 3140,4440 h50
J3: Top Overlay "2" at 2760,3980 h50 r270; Top Overlay "1" at 2660,3980 h50 r270; Top Overlay "27" at 2660,2520 h50 r270; Top Overlay "28" at 2760,2520 h50 r270
J4: Top Overlay "28" at 5100,2520 h50 r270; Top Overlay "27" at 5000,2520 h50 r270; Top Overlay "1" at 5000,3980 h50 r270; Top Overlay "2" at 5100,3980 h50 r270
J6: Mechanical 1 "Alert PCB fab to slot details" at 4008.18,635.26 h11.81 r90; Mechanical 1 "Assign keep-out area to slot" at 3988.5,635.26 h11.81 r90; Mechanical 1 "Mech 1 - Slot cut-out" at 4027.87,635.26 h11.81 r90; Mechanical 1 "Mech 2 - Clearance, move to internal plane if present" at 4047.56,635.26 h11.81 r90
J7: Top Overlay "8" at 3400,1960 h50; Top Overlay "7" at 3400,1860 h50; Top Overlay "1" at 2960,1860 h50; Top Overlay "2" at 2940,1960 h50
J8: Top Overlay "8" at 4820,1960 h50; Top Overlay "7" at 4820,1860 h50; Top Overlay "1" at 4380,1860 h50; Top Overlay "2" at 4360,1960 h50
P8: Top Overlay "2" at 1600,1280 h50; Top Overlay "1" at 1600,1180 h50; Top Overlay "15" at 2450.74,1180 h50; Top Overlay "16" at 2451.65,1280 h50